# EAGLE board KN-CON + LCD (EAGLE 6.2)
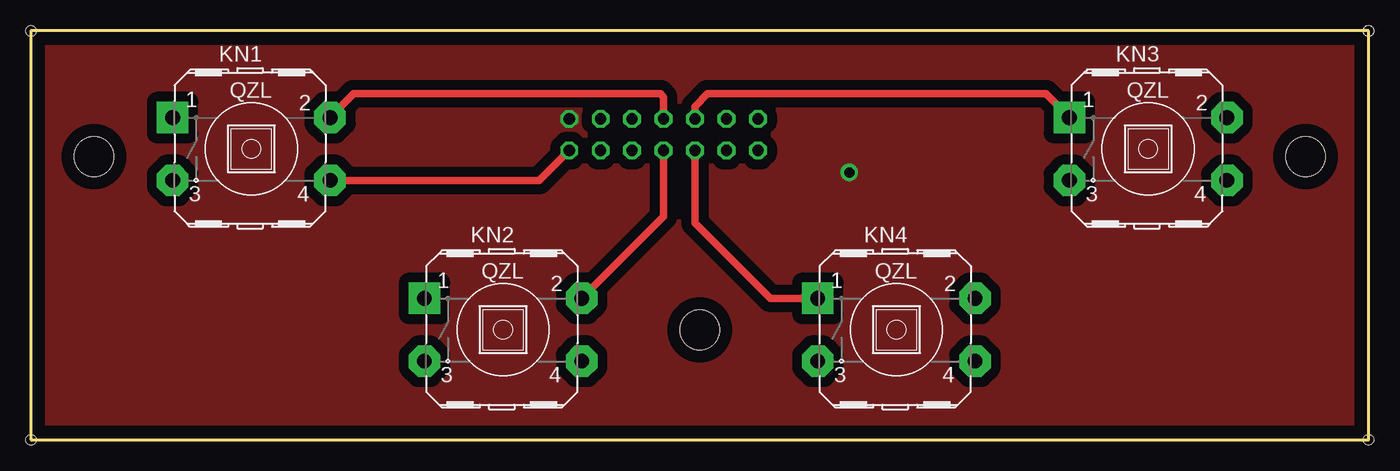
[diagram p0: board, top side]
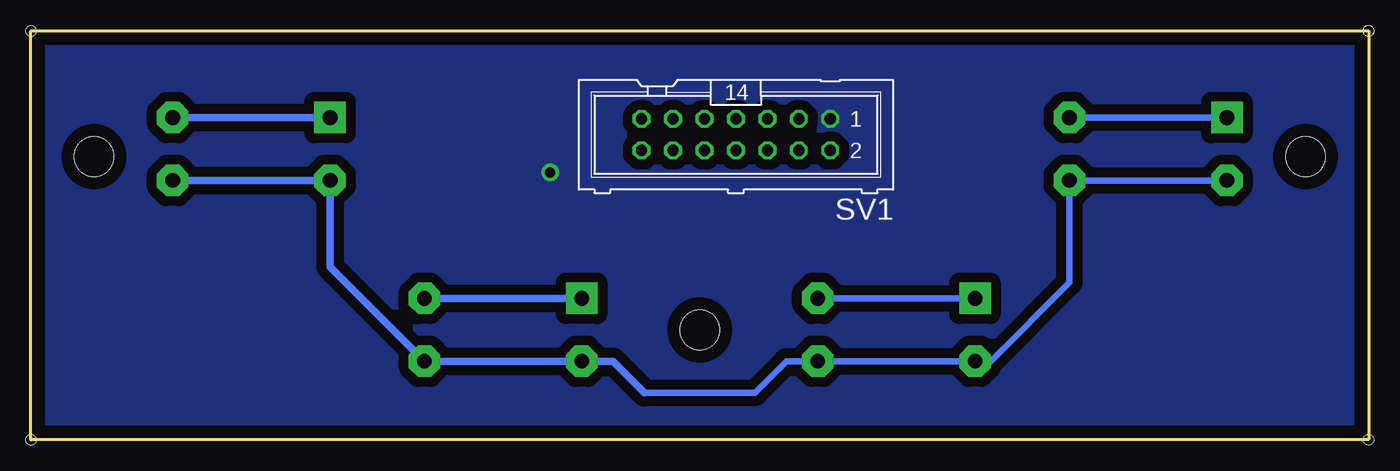
[diagram p1: board, bottom side, seen from below]

Size 107.95 x 33.02 mm. Coordinates in mm from the lower left corner, seen from the top.
Outline: 0,0 107.95,0 107.95,33.02 0,33.02 0,0
Copper layers (1*16): Top 0.035mm / dielectric 1.5mm / Bottom 0.035mm
Design rules: minimum track width 10mil, minimum drill 24mil, track to track 8mil, track to pad 8mil, pad to pad 8mil, via to via 8mil, smd to smd 8mil, copper to edge 40mil, drill to drill 8mil, minimum pad ring 10mil, minimum via ring 8mil, stop-mask expansion 4mil, vias tented up to drill 0mil, thermal gap 10mil
Holes 3.2 mm at 5.08,22.86 102.87,22.86 53.98,8.89
Holes 0.8 mm at 0,33.02 0,0 107.95,0 107.95,33.02

## Footprints (pad centres in the part's own frame; a part is rotated, then mirrored left to right if it is on the bottom)
LZQ-KN = drill 1.2 pad 2.54 square: 1 -6.35,2.54 | drill 1.2 pad 2.54 octagon: 2 6.35,2.54; 3 -6.35,-2.54; 4 6.35,-2.54
ML14 = drill 0.914 octagon: 1 -7.62,-1.27; 2 -7.62,1.27; 3 -5.08,-1.27; 4 -5.08,1.27; 5 -2.54,-1.27; 6 -2.54,1.27; 7 0,-1.27; 8 0,1.27; 9 2.54,-1.27; 10 2.54,1.27; 11 5.08,-1.27; 12 5.08,1.27; 13 7.62,-1.27; 14 7.62,1.27

## Placement (x,y rotation side)
KN1  LZQ-KN  [LZQ-KN]  17.78,23.5 0 top
KN2  LZQ-KN  [LZQ-KN]  38.1,8.89 0 top
KN3  LZQ-KN  [LZQ-KN]  90.17,23.5 0 top
KN4  LZQ-KN  [LZQ-KN]  69.85,8.89 0 top
SV1  [ML14]  51.05,24.64 180 bottom

## Library data of the parts
KN1-KN4 = Dmitry
SV1 = con-harting-ml; OC_FARNELL: unknown; OC_NEWARK: unknown

## Nets
+5V: KN1.3 KN1.4 KN2.3 KN2.4 KN3.3 KN3.4 KN4.3 KN4.4 SV1.2
AVEE: SV1.11
BL/K: SV1.12
GND: SV1.1
LCD_DB4: KN1.1 KN1.2 SV1.7
LCD_DB5: KN2.1 KN2.2 SV1.8
LCD_DB6: KN3.1 KN3.2 SV1.9
LCD_DB7: KN4.1 KN4.2 SV1.10
LCD_E: SV1.6
LCD_RS: SV1.4
LCD_RW: SV1.5
LCD_V0CON: SV1.3

## Tracks (layer width: path | path; a pad name or v marks a point on that pad's centre or on a via)
+5V
  Top 0.61: SV1.2 41.02,20.95 KN1.4
  Bottom 0.508: KN1.3 KN1.4 24.13,12.7 30.48,6.35 KN2.3 KN2.4 46.99,6.35 49.53,3.81 58.42,3.81
  Bottom 0.61: 58.42,3.81 60.96,6.35 KN4.3 KN4.4 83.82,13.97 KN3.3 KN3.4
GND  (via drill 0.8 pad 1.42)
  other vias: 66.04,21.59
  pour Top (isolate 0.813, no thermals): 0,33.02 0,0 107.95,0 107.95,33.02
  pour Bottom (isolate 0.813, no thermals): 0,33.02 107.95,33.02 107.95,0 0,0
LCD_DB4
  Top 0.61: SV1.7 51.05,27.69 50.8,27.94 26.04,27.94 KN1.2
  Bottom 0.508: KN1.1 KN1.2
LCD_DB5
  Top 0.61: KN2.2 51.05,18.03 SV1.8
  Bottom 0.508: KN2.1 KN2.2
LCD_DB6
  Top 0.61: KN3.1 81.92,27.94 54.61,27.94 53.59,26.92 SV1.9
  Bottom 0.61: KN3.1 KN3.2
LCD_DB7
  Top 0.61: KN4.1 59.69,11.43 53.59,17.53 SV1.10
  Bottom 0.61: KN4.1 KN4.2

## Text on the board
Drill_legend: Drill legend | Date: 05.05.2012 14:55:05 | 3.2000 mm / 125.984 mil | 1.2000 mm / 47.244 mil | 1.0000 mm / 39.370 mil | 0.8000 mm / 31.496 mil